# EAGLE board HAP-4xPolwender-1.0 (EAGLE 5.10)
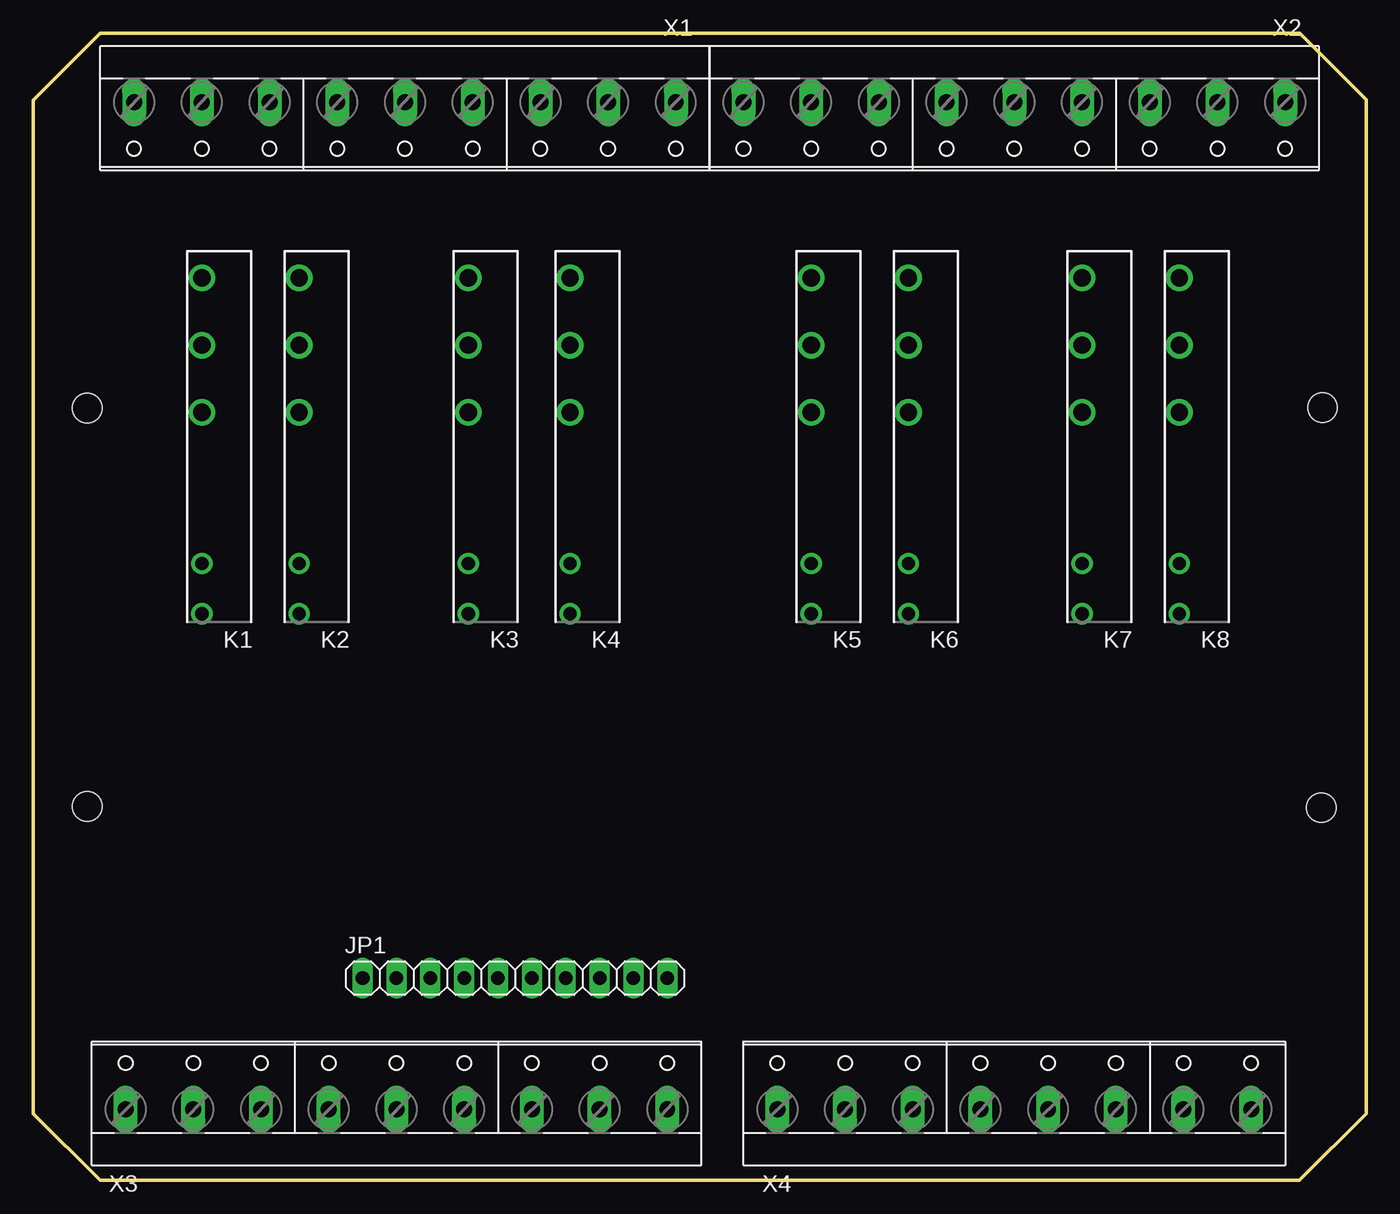
[diagram p0: board, top side]
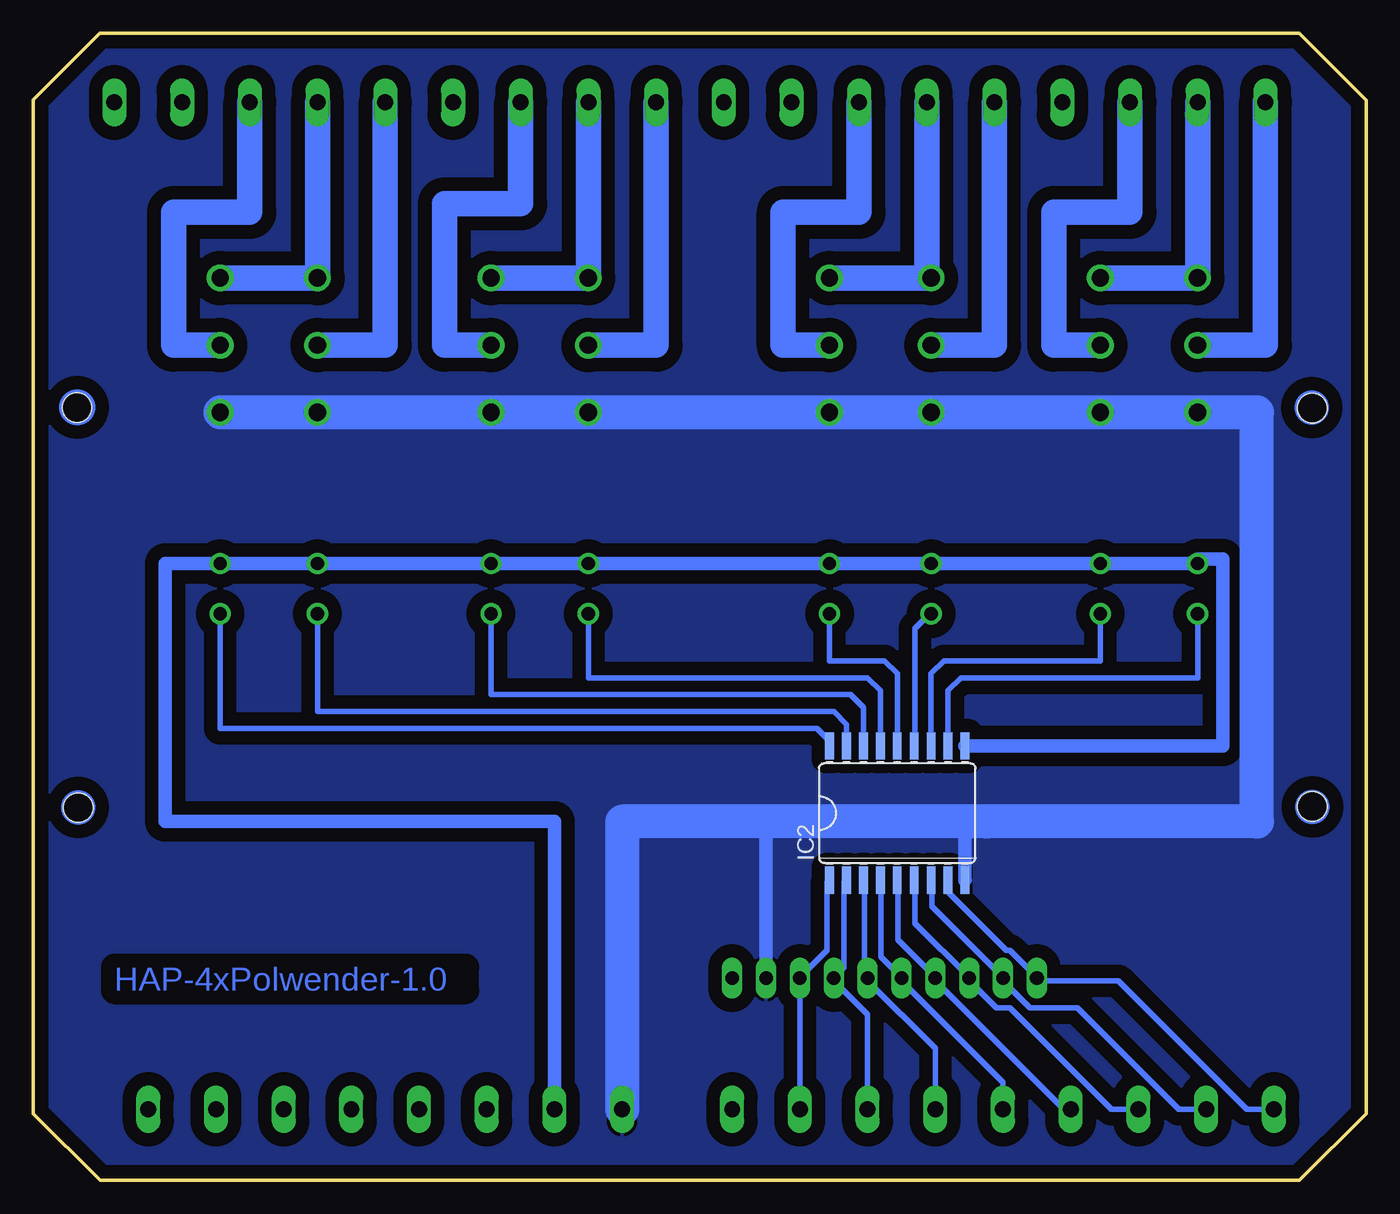
[diagram p1: board, bottom side, seen from below]

Size 100.01 x 86.08 mm. Coordinates in mm from the lower left corner, seen from the top.
Outline: 100.01,5.01 100.01,81.08 95.01,86.08 5.01,86.08 0,81.07 0.01,5 5.01,0 95,0 100,5
Copper layers (1*16): Top 0.035mm / dielectric 1.5mm / Bottom 0.035mm
Design rules "default": minimum track width 10mil, minimum drill 24mil, track to track 8mil, track to pad 12mil, pad to pad 8mil, via to via 8mil, smd to smd 8mil, copper to edge 40mil, drill to drill 8mil, minimum pad ring 10mil, minimum via ring 8mil, stop-mask expansion 4mil, vias tented up to drill 0mil, thermal gap 10mil
Net classes: 0 default: width 0.406 mm, clearance 0.102 mm; 1 Mains: width 3.251 mm, clearance 0.762 mm; 2 Medium: width 1.016 mm, clearance 0.254 mm
Holes 2.2 mm at 4.04,28.07 96.64,27.97 4.04,57.96 96.74,58

## Footprints (pad centres in the part's own frame; a part is rotated, then mirrored left to right if it is on the bottom)
SO18W = smd 0.66 x 2.032: 1 -5.08,-5.029; 2 -3.81,-5.029; 3 -2.54,-5.029; 4 -1.27,-5.029; 5 0,-5.029; 6 1.27,-5.029; 7 2.54,-5.029; 8 3.81,-5.029; 9 5.08,-5.029; 10 5.08,5.029; 11 3.81,5.029; 12 2.54,5.029; 13 1.27,5.029; 14 0,5.029; 15 -1.27,5.029; 16 -2.54,5.029; 17 -3.81,5.029; 18 -5.08,5.029
1X10 = drill 1.016 long: 1 -11.43,0; 2 -8.89,0; 3 -6.35,0; 4 -3.81,0; 5 -1.27,0; 6 1.27,0; 7 3.81,0; 8 6.35,0; 9 8.89,0; 10 11.43,0
FTR-LYC = drill 1 pad 1.6 round: 1 -3.78,0; 2 0,0 | drill 1.3 pad 2 round: 3 11.34,0; 4 16.38,0; 5 21.42,0
W237-9P = drill 1.194 long: 1 -20.32,-0.635; 2 -15.24,-0.635; 3 -10.16,-0.635; 4 -5.08,-0.635; 5 0,-0.635; 6 5.08,-0.635; 7 10.16,-0.635; 8 15.24,-0.635; 9 20.32,-0.635
W237-8P = drill 1.194 long: 1 -17.78,-0.635; 2 -12.7,-0.635; 3 -7.62,-0.635; 4 -2.54,-0.635; 5 2.54,-0.635; 6 7.62,-0.635; 7 12.7,-0.635; 8 17.78,-0.635

## Placement (x,y rotation side)
IC2  [SO18W]  35.19,27.57 0 bottom
JP1  [1X10]  36.14,15.18 0 top
K1  FTR-LYC12  [FTR-LYC]  12.64,46.3 90 top
K2  FTR-LYC12  [FTR-LYC]  19.95,46.3 90 top
K3  FTR-LYC12  [FTR-LYC]  32.65,46.3 90 top
K4  FTR-LYC12  [FTR-LYC]  40.27,46.3 90 top
K5  FTR-LYC12  [FTR-LYC]  58.37,46.3 90 top
K6  FTR-LYC12  [FTR-LYC]  65.67,46.3 90 top
K7  FTR-LYC12  [FTR-LYC]  78.69,46.3 90 top
K8  FTR-LYC12  [FTR-LYC]  85.99,46.3 90 top
X1  [W237-9P]  27.88,80.27 180 top
X2  [W237-9P]  73.61,80.27 180 top
X3  [W237-9P]  27.25,5.98 0 top
X4  [W237-8P]  73.61,5.98 0 top

## Library data of the parts
IC2 = uln-udn
JP1 = pinhead
K1-K8 = relay
X1-X4 = con-wago-508

## Nets
GND [Medium]: IC2.9 JP1.9 K1.3 K2.3 K3.3 K4.3 K5.3 K6.3 K7.3 K8.3 X4.1
I1: IC2.8 JP1.1 X3.1
I2: IC2.7 JP1.2 X3.2
I3: IC2.6 JP1.3 X3.3
I4: IC2.5 JP1.4 X3.4
I5: IC2.4 JP1.5 X3.5
I6: IC2.3 JP1.6 X3.6
I7: IC2.2 JP1.7 X3.7
I8: IC2.1 JP1.8 X3.8
N$1: K1.4 X1.9
N$2: K3.4 X1.5
N$3: K3.5 K4.5 X1.4
N$4: K5.4 X2.9
N$5: K5.5 K6.5 X2.8
N$6: K7.4 X2.5
N$7: K8.4 X2.3
N$8: K1.5 K2.5 X1.8
N$9: K2.4 X1.7
N$10: K4.4 X1.3
N$11: K6.4 X2.7
N$12: K7.5 K8.5 X2.4
O1: IC2.11 K1.1
O2: IC2.12 K2.1
O3: IC2.13 K3.1
O4: IC2.14 K4.1
O5: IC2.15 K5.1
O6: IC2.16 K6.1
O7: IC2.17 K7.1
O8: IC2.18 K8.1
VCCSUPPLY [Medium]: IC2.10 K1.2 K2.2 K3.2 K4.2 K5.2 K6.2 K7.2 K8.2 X4.2

## Tracks (layer width: path | path; a pad name or v marks a point on that pad's centre or on a via)
GND
  Bottom 0.813: 29.79,26.93 30.11,26.61
  Bottom 1.016: 45.03,26.93 JP1.9 | IC2.9 30.11,26.93 28.52,26.93
  Bottom 1.422: K1.3 K2.3 K3.3 | K7.3 79.32,57.64 79.32,57.41 78.69,57.41 K7.3
  Bottom 2.54: K8.3 K7.3 K6.3 K5.3 K4.3 K3.3 8.2,57.64 8.2,26.93 28.52,26.93 29.79,26.93 45.03,26.93 55.82,26.93 X4.1
  pour Bottom (isolate 1.016): 0.58,81.54 4.39,85.99 95.2,85.99 100.28,80.91 100.28,4.71 95.2,0.26 5.03,0.26 -0.05,4.71 -0.05,80.91
I1
  Bottom 0.406: IC2.8 31.31,22.36 31.31,21.6 27,17.28 26.74,17.28 24.71,15.25 JP1.1 24.71,14.99 18.61,14.99 8.96,5.34 X3.1
I2
  Bottom 0.406: IC2.7 32.58,22.36 32.58,20.58 27.25,15.25 JP1.2 27.25,14.99 25.22,12.96 21.66,12.96 14.04,5.34 X3.2
I3
  Bottom 0.406: IC2.6 33.85,22.36 33.85,19.31 29.79,15.25 JP1.3 29.79,14.99 27.76,12.96 26.74,12.96 19.12,5.34 X3.3
I4
  Bottom 0.406: IC2.5 35.12,22.36 35.12,18.04 32.33,15.25 JP1.4 32.33,14.99 22.68,5.34 X3.4
I5
  Bottom 0.406: IC2.4 36.39,22.36 36.39,16.77 34.87,15.25 JP1.5 34.87,14.99 27.25,7.37 X3.5
I6
  Bottom 0.406: IC2.3 37.66,22.36 37.66,15.5 37.41,15.25 JP1.6 37.41,14.99 32.33,9.91 X3.6
I7
  Bottom 0.406: IC2.2 39.19,22.36 39.19,16.01 39.95,15.25 JP1.7 39.95,14.99 37.41,12.45 X3.7
I8
  Bottom 0.406: IC2.1 40.46,22.36 40.46,17.28 42.49,15.25 JP1.8 X3.8
N$1
  Bottom 1.93: K1.4 7.57,62.68 X1.9
N$2
  Bottom 1.93: K3.4 27.88,62.68 X1.5
N$3
  Bottom 1.93: K4.5 K3.5 32.96,67.72 X1.4
N$4
  Bottom 1.93: K5.4 53.28,62.68 X2.9
N$5
  Bottom 1.93: K6.5 K5.5 X2.8
N$6
  Bottom 1.93: K7.4 73.61,62.68 X2.5
N$7
  Bottom 1.93: K8.4 89.48,62.68 89.48,72.65 83.77,72.65 X2.3
N$8
  Bottom 1.93: X1.8 K1.5 K2.5
N$9
  Bottom 1.93: K2.4 23.44,62.68 23.44,72.65 17.72,72.65 X1.7
N$10
  Bottom 1.93: K4.4 43.76,62.68 43.76,72.65 38.05,72.65 X1.3
N$11
  Bottom 1.93: K6.4 69.16,62.68 69.16,73.28 63.45,73.28 X2.7
N$12
  Bottom 1.93: K8.5 K7.5 X2.4
O1
  Bottom 0.406: IC2.11 31.38,36.77 30.42,37.73 12.64,37.73 K1.1
O2
  Bottom 0.406: IC2.12 32.65,38.04 31.7,38.99 19.95,38.99 K2.1
O3
  Bottom 0.406: IC2.13 33.85,32.77 33.85,41.41 32.84,42.42 K3.1
O4
  Bottom 0.406: IC2.14 35.19,38.04 36.14,38.99 40.27,38.99 K4.1
O5
  Bottom 0.406: IC2.15 36.46,36.77 37.41,37.73 58.37,37.73 K5.1
O6
  Bottom 0.406: IC2.16 37.73,35.5 38.68,36.45 65.67,36.45 K6.1
O7
  Bottom 0.406: IC2.17 39,34.23 39.95,35.19 78.69,35.19 K7.1
O8
  Bottom 0.406: IC2.18 40.27,32.96 41.22,33.91 85.99,33.91 K8.1
VCCSUPPLY
  Bottom 1.016: IC2.10 10.74,32.59 10.74,46.62 12.64,46.62 K1.2 K2.2 K3.2 K4.2 K5.2 K6.2 K7.2 K8.2 90.12,46.3 90.12,26.93 60.91,26.93 X4.2
(copper drawn outside any net)
  shapes: Bottom circle x4

## Text on the board
Bottom: HAP-4xPolwender-1.0